# EAGLE board flossjtag-teardrops (EAGLE 5.06)
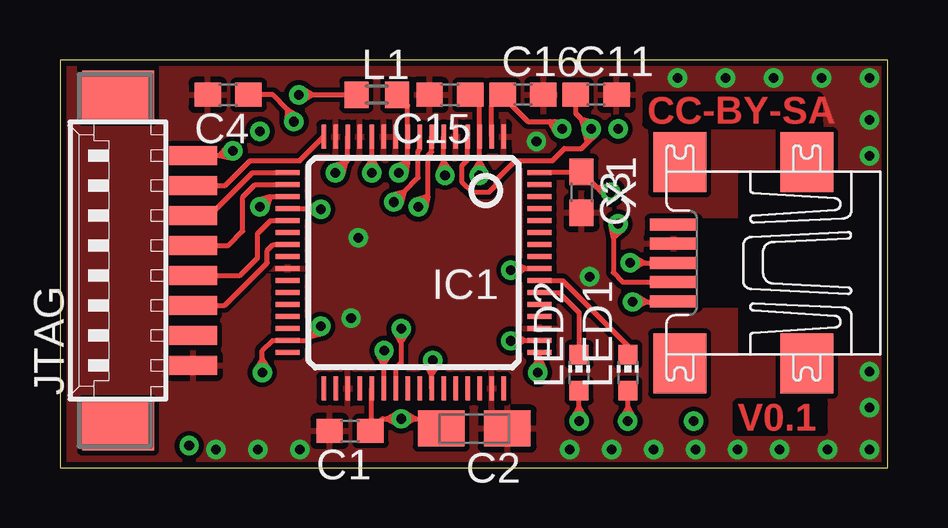
[diagram p0: board, top side]
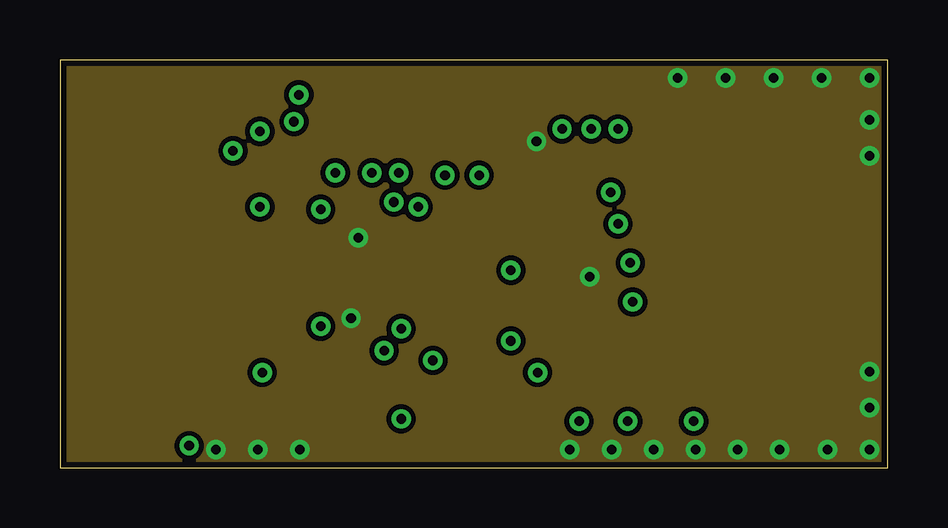
[diagram p1: board, inner layer Route2]
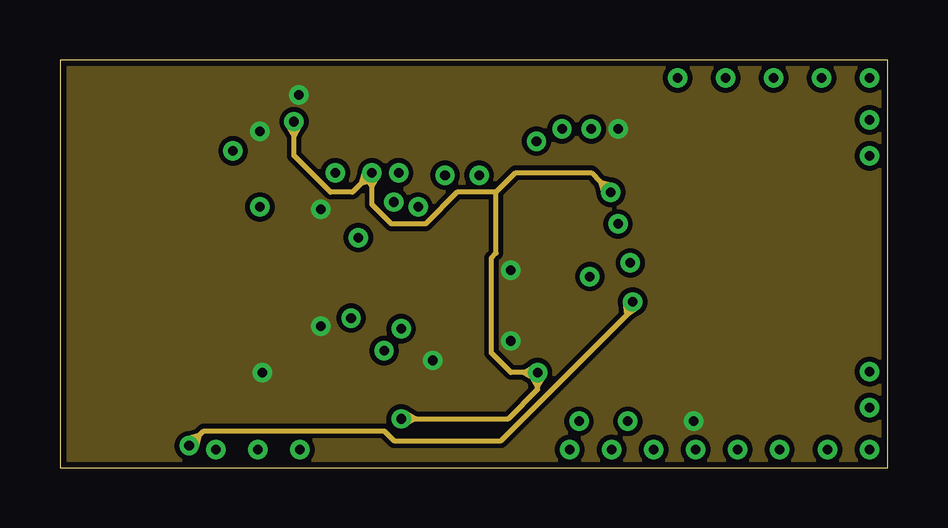
[diagram p2: board, inner layer Route15]
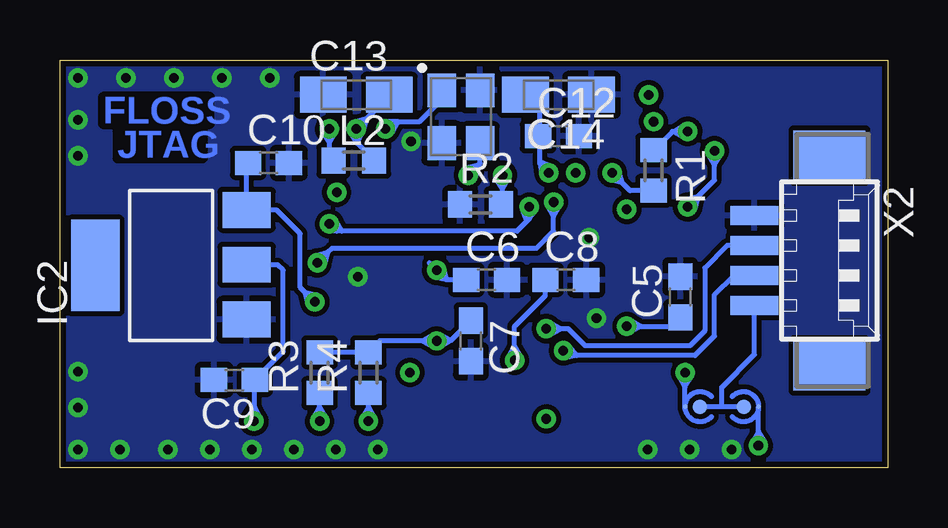
[diagram p3: board, bottom side, seen from below]

Size 34.5 x 17 mm. Coordinates in mm from the lower left corner, seen from the top.
Outline: 0,0 34.5,0 34.5,17 0,17 0,0
Copper layers (1*2+15*16): Top 0.035mm / dielectric 0.3mm / Route2 0.035mm / dielectric 0.15mm / Route15 0.035mm / dielectric 0.3mm / Bottom 0.035mm
Design rules "default *": minimum track width 7mil, minimum drill 0.4mm, track to track 8mil, track to pad 8mil, pad to pad 8mil, via to via 8mil, smd to smd 8mil, copper to edge 10mil, drill to drill 8mil, minimum pad ring 10mil, minimum via ring 8mil, stop-mask expansion 4mil, vias tented up to drill 0.4mm, thermal gap 10mil

## Footprints (pad centres in the part's own frame; a part is rotated, then mirrored left to right if it is on the bottom)
C0603 = smd 1.1 x 1: 1 -0.85,0; 2 0.85,0
A/3216-18R = smd 1.95 x 1.5: + 1.375,0; - -1.375,0
CIRC_JMP = smd 0.61 x 0.61: 1 0,0 | smd 0.203 x 0.203: 2 0,0.617
LQFP64 = smd 0.2 x 1: 1 -2.75,-4.25; 2 -2.25,-4.25; 3 -1.75,-4.25; 4 -1.25,-4.25; 5 -0.75,-4.25; 6 -0.25,-4.25; 7 0.25,-4.25; 8 0.75,-4.25; 9 1.25,-4.25; 10 1.75,-4.25; 11 2.25,-4.25; 12 2.75,-4.25; 13 3.25,-4.25; 14 3.75,-4.25; 15 4.25,-4.25; 16 4.75,-4.25; 33 4.75,6.25; 34 4.25,6.25; 35 3.75,6.25; 36 3.25,6.25; 37 2.75,6.25; 38 2.25,6.25; 39 1.75,6.25; 40 1.25,6.25; 41 0.75,6.25; 42 0.25,6.25; 43 -0.25,6.25; 44 -0.75,6.25; 45 -1.25,6.25; 46 -1.75,6.25; 47 -2.25,6.25; 48 -2.75,6.25 | smd 1 x 0.2: 17 6.25,-2.75; 18 6.25,-2.25; 19 6.25,-1.75; 20 6.25,-1.25; 21 6.25,-0.75; 22 6.25,-0.25; 23 6.25,0.25; 24 6.25,0.75; 25 6.25,1.25; 26 6.25,1.75; 27 6.25,2.25; 28 6.25,2.75; 29 6.25,3.25; 30 6.25,3.75; 31 6.25,4.25; 32 6.25,4.75; 49 -4.25,4.75; 50 -4.25,4.25; 51 -4.25,3.75; 52 -4.25,3.25; 53 -4.25,2.75; 54 -4.25,2.25; 55 -4.25,1.75; 56 -4.25,1.25; 57 -4.25,0.75; 58 -4.25,0.25; 59 -4.25,-0.25; 60 -4.25,-0.75; 61 -4.25,-1.25; 62 -4.25,-1.75; 63 -4.25,-2.25; 64 -4.25,-2.75
SOT223 = smd 1.499 x 2.007: 1 -2.261,-3.15; 2 0.025,-3.15; 3 2.311,-3.15 | smd 3.81 x 2.007: 4 0,3.15
53261-08 = smd 0.8 x 2: 1 4.375,-2.5; 2 3.125,-2.5; 3 1.875,-2.5; 4 0.625,-2.5; 5 -0.625,-2.5; 6 -1.875,-2.5; 7 -3.125,-2.5; 8 -4.375,-2.5 | smd 2.1 x 3: S1 6.875,0.625; S2 -6.875,0.625
R0603 = smd 1 x 1.1: 1 -0.85,0; 2 0.85,0
CHIP-LED0603 = smd 0.8 x 0.8: A 0,-0.75; C 0,0.75
UX60A-MB-5ST = smd 2 x 0.5: 1 2.25,1.6; 2 2.25,0.8; 3 2.25,0; 4 2.25,-0.8; 5 2.25,-1.6 | smd 2.2 x 2.5: M1 -3.3,-4.2; M2 -3.3,4.2; M3 2,4.2; M4 2,-4.2
53261-04 = smd 0.8 x 2: 1 1.875,-2.5; 2 0.625,-2.5; 3 -0.625,-2.5; 4 -1.875,-2.5 | smd 2.1 x 3: S1 4.375,0.625; S2 -4.375,0.625
NX3225SA = smd 1.4 x 1.2: 1 -1.1,-0.8; 2 1.1,-0.8; 3 1.1,0.8; 4 -1.1,0.8

## Placement (x,y rotation side)
C1  100n  [C0603]  12.09,1.52 180 top
C2  3u3  [A/3216-18R]  17.27,1.63 180 top
C3  100n  [C0603]  21.74,11.48 270 top
C4  100n  [C0603]  7.01,15.54 180 top
C5  100n  [C0603]  8.64,7.11 90 bottom
C6  100n  [C0603]  16.71,7.82 0 bottom
C7  100n  [C0603]  17.37,5.28 270 bottom
C8  100n  [C0603]  13.41,7.82 0 bottom
C9  100n  [C0603]  27.23,3.66 180 bottom
C10  100n  [C0603]  25.81,12.7 0 bottom
C11  100n  [C0603]  22.35,15.54 0 top
C12  100n  [C0603]  13.72,13.82 0 bottom
C13  4u7  [A/3216-18R]  22.15,15.54 0 bottom
C14  4u7  [A/3216-18R]  13.72,15.54 180 bottom
C15  27p  [C0603]  16.26,15.54 180 top
C16  27p  [C0603]  19.3,15.54 0 top
CJ1  CIRC_JMP  [CIRC_JMP]  5.99,2.54 270 bottom
CJ2  CIRC_JMP  [CIRC_JMP]  7.82,2.54 90 bottom
IC1  FT2232HL  [LQFP64]  15.75,9.55 180 top
IC2  REG1117  [SOT223]  29.87,8.43 90 bottom
JTAG  53261-08  [53261-08]  3.05,8.64 90 top
L1  [R0603]  13.21,15.54 0 top
L2  [R0603]  22.25,12.8 0 bottom
LED1  [CHIP-LED0603]  23.67,3.96 0 top
LED2  [CHIP-LED0603]  21.64,3.96 0 top
R1  1k  [R0603]  9.75,12.4 270 bottom
R2  12k  [R0603]  16.97,10.97 0 bottom
R3  220  [R0603]  23.67,3.96 90 bottom
R4  220  [R0603]  21.64,3.96 90 bottom
X1  MINI-USB-UX60A-MB-5ST  [UX60A-MB-5ST]  27.84,8.53 180 top
X2  53261-04  [53261-04]  3.05,8.64 270 bottom
X3  12MHz  [NX3225SA]  17.78,14.63 270 bottom

## Library data of the parts
C1-C16 R1-R4 = resistor
CJ1 CJ2 = fancy_jumpers
IC1 = ftdi
IC2 = burr-brown
JTAG X2 = con-molex
L1 L2 X3 = misc
LED1 LED2 = led
X1 = con-hirose

## Nets
+3V3: C5.1 C6.1 C7.1 C8.1 C9.1 CJ2.2 IC1.20 IC1.31 IC1.42 IC1.50 IC1.56 IC2.2 L1.1 L2.1 R1.1 R3.2 R4.2
+5V: C10.1 CJ1.2 IC2.3 X1.1
GND: C1.2 C2.- C3.2 C4.2 C5.2 C6.2 C7.2 C8.2 C9.2 C10.2 C11.2 C12.2 C13.- C14.- C15.2 C16.2 IC1.1 IC1.5 IC1.10 IC1.11 IC1.13 IC1.15 IC1.25 IC1.35 IC1.47 IC1.51 IC2.1 JTAG.8 R2.1 X1.4 X2.4 X3.2 X3.4
N$1: IC1.14 R1.2
N$2: IC1.6 R2.2
N$3: IC1.7 X1.2
N$4: IC1.8 X1.3
N$5: CJ1.1 CJ2.1 X2.1
N$6: C16.1 IC1.2 X3.1
N$7: C12.1 C14.+ IC1.9 L1.2
N$8: C11.1 C13.+ IC1.4 L2.2
N$9: C15.1 IC1.3 X3.3
N$10: LED1.A R3.1
N$11: LED2.A R4.1
PWREN: IC1.60
RST: IC1.23 JTAG.6
RXD: IC1.39 X2.3
RXD_LED: IC1.54 LED2.C
TCK: IC1.16 JTAG.2
TDI: IC1.17 JTAG.3
TDO: IC1.18 JTAG.4
TMS: IC1.19 JTAG.1
TRST: IC1.21 JTAG.5
TXD: IC1.38 X2.2
TXD_LED: IC1.55 LED1.C
TXDEN: IC1.48
VCC: C1.1 C2.+ C3.1 C4.1 IC1.12 IC1.37 IC1.49 IC1.64

## Tracks (layer width: path | path; a pad name or v marks a point on that pad's centre or on a via)
+3V3  (via drill 0.4)
  Top 0.203: 10.45,5.47 10.28,5.3 IC1.31 8.86,5.3 8.43,4.88 8.43,4.56 | 10.45,5.47 v10.87,5.89 | v15.54,4.47 15.5,4.42 15.5,3.87 | IC1.42 15.5,3.87 | v18.8,5.28 18.81,5.3 19.4,5.3 | 19.4,5.3 IC1.50 | 19.39,8.3 18.87,8.3 v18.8,8.23 | 19.39,8.3 IC1.56 | v10.87,10.77 10.84,10.8 10.27,10.8 | IC1.20 10.27,10.8 | v9.96,15.54 10.56,15.54 | 10.56,15.54 L1.1 | v8.43,3.96 8.43,4.56 | 10.45,5.47 10.95,5.6 v10.87,5.89 | 10.45,5.47 10.58,5.97 v10.87,5.89 | 15.5,3.87 15.79,4.3 v15.54,4.47 | 15.5,3.87 15.27,4.34 v15.54,4.47 | 19.4,5.3 18.94,5.55 v18.8,5.28 | 19.4,5.3 18.95,5.03 v18.8,5.28 | 19.39,8.3 18.92,8.51 v18.8,8.23 | 19.39,8.3 18.98,7.99 v18.8,8.23 | 10.27,10.8 10.71,10.52 v10.87,10.77 | 10.27,10.8 10.73,11.04 v10.87,10.77 | 10.56,15.54 10.11,15.81 v9.96,15.54 | 10.56,15.54 10.11,15.28 v9.96,15.54 | 8.43,4.56 8.17,4.11 v8.43,3.96 | 8.43,4.56 8.69,4.11 v8.43,3.96
  Bottom 0.203: C5.1 9.01,5.89 10.27,5.89 | v10.87,5.89 10.27,5.89 | 17.1,5.86 C7.1 18.2,5.31 | 18.2,5.31 18.22,5.28 v18.8,5.28 | v18.8,8.23 19.1,8.53 | C6.1 18.36,7.82 | 18.36,7.82 18.39,7.82 v18.8,8.23 | C8.1 14.26,7.18 15.54,5.89 15.54,5.07 | v15.54,4.47 15.54,5.07 | R1.1 8.98,14.02 8.93,14.02 | 8.93,14.02 v8.33,14.02 | R3.2 R4.2 21.17,5.28 19.4,5.28 | v18.8,5.28 19.4,5.28 | IC2.2 25.43,8.46 25.2,8.23 25.2,4.84 C9.1 26.38,2.53 | 26.38,2.53 26.38,1.97 v26.42,1.93 | L2.1 23.27,12.97 23.27,13.52 | 23.27,13.52 v23.27,14.12 | v8.43,3.96 v8.44,3.96 8.44,3.36 | CJ2.2 8.44,3.36 | 10.27,5.89 10.72,5.63 v10.87,5.89 | 10.27,5.89 10.72,6.15 v10.87,5.89 | 15.54,5.07 15.28,4.62 v15.54,4.47 | 15.54,5.07 15.81,4.62 v15.54,4.47 | 18.2,5.31 18.63,5.03 v18.8,5.28 | 18.2,5.31 18.66,5.55 v18.8,5.28 | 19.4,5.28 18.95,5.54 v18.8,5.28 | 19.4,5.28 18.95,5.02 v18.8,5.28 | 18.36,7.82 18.86,7.93 v18.8,8.23 | 18.36,7.82 18.51,8.32 v18.8,8.23 | 23.27,13.52 23.53,13.97 v23.27,14.12 | 23.27,13.52 23.01,13.97 v23.27,14.12 | 8.93,14.02 8.48,14.28 v8.33,14.02 | 8.93,14.02 8.48,13.76 v8.33,14.02 | 26.38,2.53 26.15,2.07 v26.42,1.93 | 26.38,2.53 26.67,2.1 v26.42,1.93 | 8.44,3.36 8.7,3.81 v8.43,3.96 | 8.44,3.36 8.17,3.81 v8.43,3.96
  pour Route15: 0,0 34.5,0 34.5,17 0,17
+5V  (via drill 0.4)
  Top 0.203: X1.1 25.56,6.91 24.48,6.91 | v23.88,6.91 24.48,6.91 | 24.48,6.91 24.03,7.17 v23.88,6.91 | 24.48,6.91 24.03,6.65 v23.88,6.91
  Route15 0.203: v23.88,6.91 23.88,6.6 23.63,6.36 | 23.63,6.36 18.39,1.12 13.92,1.12 13.51,1.52 5.99,1.52 5.81,1.34 | v5.38,0.91 5.81,1.34 | 23.63,6.36 24.05,6.66 v23.88,6.91 | 23.63,6.36 23.58,6.88 v23.88,6.91 | 5.81,1.34 5.31,1.21 v5.38,0.91 | 5.81,1.34 5.68,0.84 v5.38,0.91
  Bottom 0.203: v23.88,6.91 24.3,7.33 | 24.3,7.33 24.49,7.52 24.49,9.75 25.48,10.74 IC2.3 26.72,12.64 C10.1 | v5.38,0.91 5.38,1.51 | 5.38,1.51 CJ1.2 | 24.3,7.33 23.8,7.2 v23.88,6.91 | 24.3,7.33 24.17,6.83 v23.88,6.91 | 5.38,1.51 5.12,1.06 v5.38,0.91 | 5.38,1.51 5.64,1.07 v5.38,0.91
GND  (via drill 0.4)
  other vias: 33.75,0.75 32,0.75 30,0.75 28.25,0.75 26.5,0.75 24.75,0.75 33.75,2.5 33.75,4 23,0.75 21.25,0.75 33.75,16.25 33.75,14.5 33.75,13 6.5,0.75 8.25,0.75 10,0.75 12.44,9.59 12.13,6.24 22.09,7.96 19.87,13.61 31.75,16.25 29.75,16.25 27.75,16.25 25.75,16.25
  pour Route2: 0,0 34.5,0 34.5,17 0,17
  pour Top: 0,0 34.5,0 34.5,17 0,17
  pour Bottom: 0,0 34.5,0 34.5,17 0,17
N$1  (via drill 0.4)
  Top 0.203: v11.48,12.29 11.9,12.72 | 11.9,12.72 12,12.81 IC1.14 | 11.9,12.72 11.4,12.59 v11.48,12.29 | 11.9,12.72 11.77,12.22 v11.48,12.29
  Bottom 0.203: R1.2 10.73,11.54 11.06,11.87 | 11.06,11.87 v11.48,12.29 | 11.06,11.87 11.56,12 v11.48,12.29 | 11.06,11.87 11.19,12.37 v11.48,12.29
N$2  (via drill 0.4)
  Top 0.203: v16.05,12.19 16,12.25 16,12.79 | 16,12.79 IC1.6 | 16,12.79 15.78,12.32 v16.05,12.19 | 16,12.79 16.3,12.37 v16.05,12.19
  Bottom 0.203: 16.05,11.59 16.05,11.04 R2.2 | 16.05,11.59 v16.05,12.19 | 16.05,11.59 16.31,12.04 v16.05,12.19 | 16.05,11.59 15.79,12.04 v16.05,12.19
N$3  (via drill 0.4)
  Top 0.203: IC1.7 15.5,13.16 15.34,13.01 15.34,11.31 | 15.34,11.31 15.34,11.28 v14.94,10.87 | v23.27,10.16 23.06,9.96 23.06,9.6 | 23.06,9.6 23.06,8.13 23.46,7.73 X1.2 | 15.34,11.31 14.85,11.16 v14.94,10.87 | 15.34,11.31 15.23,10.81 v14.94,10.87 | 23.06,9.6 23.46,9.93 v23.27,10.16 | 23.06,9.6 22.97,10.11 v23.27,10.16
  Bottom 0.203: 15.02,10.28 14.94,10.36 v14.94,10.87 | 15.02,10.28 15.44,9.86 22.75,9.86 | 22.75,9.86 22.96,9.86 v23.27,10.16 | 15.02,10.28 15.21,10.76 v14.94,10.87 | 15.02,10.28 14.7,10.68 v14.94,10.87 | 22.75,9.86 23.27,9.86 v23.27,10.16 | 22.75,9.86 23,10.31 v23.27,10.16
N$4  (via drill 0.4)
  Top 0.203: IC1.8 15,13.27 14.94,13.21 14.94,12.09 14.34,11.5 | v13.92,11.07 14.34,11.5 | v23.77,8.53 24.38,8.53 | 24.38,8.53 X1.3 | 14.34,11.5 13.84,11.37 v13.92,11.07 | 14.34,11.5 14.21,11 v13.92,11.07 | 24.38,8.53 23.93,8.79 v23.77,8.53 | 24.38,8.53 23.93,8.27 v23.77,8.53
  Bottom 0.203: 13.92,10.47 13.92,9.86 14.63,9.14 23.16,9.14 23.35,8.96 | 13.92,10.47 v13.92,11.07 | 23.35,8.96 v23.77,8.53 | 13.92,10.47 14.18,10.92 v13.92,11.07 | 13.92,10.47 13.66,10.92 v13.92,11.07 | 23.35,8.96 23.48,8.46 v23.77,8.53 | 23.35,8.96 23.85,8.83 v23.77,8.53
N$5
  Bottom 0.203: X2.1 5.55,4.71 6.91,3.35 6.91,2.54 | CJ1.1 6.91,2.54 | 6.91,2.54 CJ2.1
N$6  (via drill 0.4)
  Top 0.203: IC1.2 18,15.09 C16.1 18.59,15.54 18.59,15.34 19.51,14.43 20.41,14.43 | 20.41,14.43 20.62,14.43 v20.93,14.12 | 20.41,14.43 20.67,13.97 v20.93,14.12 | 20.41,14.43 20.93,14.42 v20.93,14.12
  Bottom 0.203: X3.1 18.58,15.35 19.51,14.43 20.41,14.43 | 20.41,14.43 20.62,14.43 v20.93,14.12 | 20.41,14.43 20.67,13.97 v20.93,14.12 | 20.41,14.43 20.93,14.42 v20.93,14.12
N$7  (via drill 0.4)
  Top 0.203: 14.5,12.76 14.5,12.67 v14.12,12.29 | 14.5,12.76 IC1.9 14.5,15.11 L1.2 | 14.5,12.76 14.01,12.57 v14.12,12.29 | 14.5,12.76 14.42,12.25 v14.12,12.29
  Bottom 0.203: C14.+ 14.5,14.95 IC1.9 | IC1.9 14.52,13.82 C12.1 | 14.5,12.76 14.5,12.67 v14.12,12.29 | 14.5,12.76 IC1.9 | 14.5,12.76 14.01,12.57 v14.12,12.29 | 14.5,12.76 14.42,12.25 v14.12,12.29
N$8  (via drill 0.4)
  Top 0.203: IC1.4 17,12.83 16.76,12.6 16.76,11.89 17.17,11.48 17.88,11.48 18.19,11.79 18.19,11.99 19,12.8 20.52,12.8 21.03,13.31 21.74,13.31 21.98,13.55 | C11.1 21.5,14.77 21.72,14.55 | v22.15,14.12 21.72,14.55 | 21.98,13.55 22.15,13.72 v22.15,14.12 | 21.72,14.55 21.86,14.05 | 21.86,14.05 21.86,14.04 v22.15,14.12 | 21.72,14.55 22.23,14.41 v22.15,14.12 | 21.98,13.55 22.36,13.9 v22.15,14.12 | 21.98,13.55 21.86,14.05 | v22.15,14.12 21.86,14.05
  Bottom 0.203: v22.15,14.12 22.15,13.55 22.12,13.52 | 22.12,13.52 L2.2 | C13.+ 20.77,15.5 21.72,14.55 | v22.15,14.12 21.72,14.55 | 22.12,13.52 22.4,13.96 v22.15,14.12 | 22.12,13.52 21.88,13.98 v22.15,14.12 | 21.72,14.55 21.86,14.04 v22.15,14.12 | 21.72,14.55 22.23,14.41 v22.15,14.12
N$9  (via drill 0.4)
  Top 0.203: C15.1 17.5,15.15 IC1.3 17.5,12.79 | v17.48,12.19 17.5,12.21 17.5,12.79 | 17.5,12.79 17.22,12.35 v17.48,12.19 | 17.5,12.79 17.74,12.33 v17.48,12.19
  Bottom 0.203: X3.3 16.98,12.69 17.05,12.62 | v17.48,12.19 17.05,12.62 | 17.05,12.62 17.18,12.12 v17.48,12.19 | 17.05,12.62 17.55,12.48 v17.48,12.19
N$10  (via drill 0.4)
  Top 0.203: v23.67,1.93 23.67,2.53 | 23.67,2.53 LED1.A | 23.67,2.53 23.41,2.08 v23.67,1.93 | 23.67,2.53 23.93,2.08 v23.67,1.93
  Bottom 0.203: v23.67,1.93 23.67,2.53 | 23.67,2.53 R3.1 | 23.67,2.53 23.41,2.08 v23.67,1.93 | 23.67,2.53 23.93,2.08 v23.67,1.93
N$11  (via drill 0.4)
  Top 0.203: v21.64,1.93 21.64,2.53 | 21.64,2.53 LED2.A | 21.64,2.53 21.38,2.08 v21.64,1.93 | 21.64,2.53 21.9,2.08 v21.64,1.93
  Bottom 0.203: R4.1 LED2.A 21.64,2.53 | v21.64,1.93 21.64,2.53 | 21.64,2.53 21.38,2.08 v21.64,1.93 | 21.64,2.53 21.9,2.08 v21.64,1.93
RST
  Top 0.203: JTAG.6 6.86,6.76 8.64,8.53 8.64,9.04 8.89,9.3 IC1.23
RXD  (via drill 0.4)
  Top 0.203: v14.22,5.79 14.22,5.19 | 14.22,5.19 14.22,4.37 14,4.14 IC1.39 | 14.22,5.19 14.48,5.64 v14.22,5.79 | 14.22,5.19 13.96,5.64 v14.22,5.79
  Bottom 0.203: X2.3 6.69,9.26 7.62,8.33 7.62,5.69 8.23,5.08 12.6,5.08 13.31,5.79 13.62,5.79 | 13.62,5.79 v14.22,5.79 | 13.62,5.79 14.07,5.53 v14.22,5.79 | 13.62,5.79 14.07,6.05 v14.22,5.79
RXD_LED
  Top 0.203: IC1.54 20.8,7.3 21.64,6.46 LED2.C
TCK
  Top 0.203: JTAG.2 6.88,11.76 7.92,12.8 10,12.8 IC1.16
TDI
  Top 0.203: JTAG.3 6.24,10.51 8.03,12.29 IC1.17
TDO
  Top 0.203: JTAG.4 7.03,9.26 7.62,9.86 7.62,11.28 8.14,11.8 IC1.18
TMS  (via drill 0.4)
  Top 0.203: IC1.19 8.76,11.3 | v8.33,10.87 8.76,11.3 | v7.21,13.21 7.02,13.01 6.65,13.01 | 6.65,13.01 JTAG.1 | 8.76,11.3 8.25,11.16 v8.33,10.87 | 8.76,11.3 8.62,10.79 v8.33,10.87 | 6.65,13.01 7.16,12.91 v7.21,13.21 | 6.65,13.01 6.99,13.4 v7.21,13.21
  Bottom 0.203: 7.91,11.3 7.21,11.99 7.21,12.61 | 7.91,11.3 v8.33,10.87 | 7.21,12.61 v7.21,13.21 | 7.91,11.3 8.04,10.79 v8.33,10.87 | 7.91,11.3 8.41,11.16 v8.33,10.87 | 7.21,12.61 7.47,13.06 v7.21,13.21 | 7.21,12.61 6.95,13.06 v7.21,13.21
TRST
  Top 0.203: JTAG.5 7.5,8.01 8.23,8.74 8.23,9.75 8.78,10.3 IC1.21
TXD  (via drill 0.4)
  Top 0.203: v13.51,4.88 13.5,4.86 13.5,4.28 | 13.5,4.28 IC1.38 | 13.5,4.28 13.77,4.72 v13.51,4.88 | 13.5,4.28 13.25,4.73 v13.51,4.88
  Bottom 0.203: X2.2 6.42,8.01 7.21,7.21 7.21,5.49 8.03,4.67 12.95,4.67 | 12.95,4.67 13.31,4.67 v13.51,4.88 | 12.95,4.67 13.46,4.58 v13.51,4.88 | 12.95,4.67 13.28,5.07 v13.51,4.88
TXD_LED
  Top 0.203: IC1.55 20.95,7.8 23.67,5.08 LED1.C
VCC  (via drill 0.4)
  Top 0.203: v13.01,12.29 13.01,12.89 | 13.01,12.89 IC1.12 | IC1.64 21.71,12.3 C3.1 22.39,11.68 | v22.96,11.48 22.59,11.48 22.39,11.68 | IC1.37 13,1.58 C1.1 13.45,2.03 13.62,2.03 | C2.+ 15.79,1.52 15.29,2.03 14.82,2.03 | v9.75,14.43 9.75,14.67 9.47,14.95 | v19.91,3.96 20,4.05 20,4.56 | 20,4.56 IC1.49 | 13.62,2.03 v14.22,2.03 | v14.22,2.03 14.82,2.03 | 9.47,14.95 8.88,15.54 C4.1 | 9.47,14.95 9.45,14.44 v9.75,14.43 | 9.47,14.95 9.91,14.69 v9.75,14.43 | 13.01,12.89 12.74,12.45 v13.01,12.29 | 13.01,12.89 13.27,12.45 v13.01,12.29 | 22.39,11.68 22.73,11.28 v22.96,11.48 | 22.39,11.68 22.9,11.78 v22.96,11.48 | 13.62,2.03 14.07,1.77 v14.22,2.03 | 13.62,2.03 14.07,2.29 v14.22,2.03 | 14.82,2.03 14.38,2.29 v14.22,2.03 | 14.82,2.03 14.38,1.77 v14.22,2.03 | 20,4.56 19.68,4.15 v19.91,3.96 | 20,4.56 20.19,4.08 v19.91,3.96
  Route15 0.203: 9.75,13.83 9.75,13.01 11.28,11.48 12.19,11.48 12.58,11.87 | 9.75,13.83 v9.75,14.43 | v13.01,12.29 12.58,11.87 | 13.01,11.69 13.01,10.97 13.82,10.16 15.24,10.16 16.56,11.48 18.19,11.48 | 13.01,11.69 v13.01,12.29 | 18.19,11.48 19,12.29 22.15,12.29 22.54,11.9 | 22.54,11.9 v22.96,11.48 | 19.91,3.36 19.91,3.25 18.69,2.03 14.82,2.03 | 19.91,3.36 v19.91,3.96 | 18.19,11.48 18.19,8.94 17.98,8.74 17.98,4.78 18.8,3.96 19.31,3.96 | v19.91,3.96 19.31,3.96 | v14.22,2.03 14.82,2.03 | 9.75,13.83 10.01,14.28 v9.75,14.43 | 9.75,13.83 9.49,14.28 v9.75,14.43 | 12.58,11.87 13.08,12 v13.01,12.29 | 12.58,11.87 12.71,12.37 v13.01,12.29 | 13.01,11.69 13.27,12.14 v13.01,12.29 | 13.01,11.69 12.74,12.14 v13.01,12.29 | 22.54,11.9 22.67,11.4 v22.96,11.48 | 22.54,11.9 23.04,11.77 v22.96,11.48 | 14.82,2.03 14.38,2.29 v14.22,2.03 | 14.82,2.03 14.38,1.77 v14.22,2.03 | 19.91,3.36 20.17,3.81 v19.91,3.96 | 19.91,3.36 19.65,3.81 v19.91,3.96 | 19.31,3.96 19.76,3.7 v19.91,3.96 | 19.31,3.96 19.76,4.22 v19.91,3.96

## Text on the board
Top: CC-BY-SA | V0.1
Bottom: FLOSS | JTAG
tStop: CC-BY-SA | V0.1
bStop: FLOSS | JTAG